# Altium PCB Stacked_Pot_Breakout.PcbDoc
Units mil, origin at the board's own origin, x right, y up, seen from the top; angles counter-clockwise.
Board outline 770 x 460 mil, 2 copper layers (Top Layer, Bottom Layer); 2 components, 7 nets, 18 pads, 0 vias.
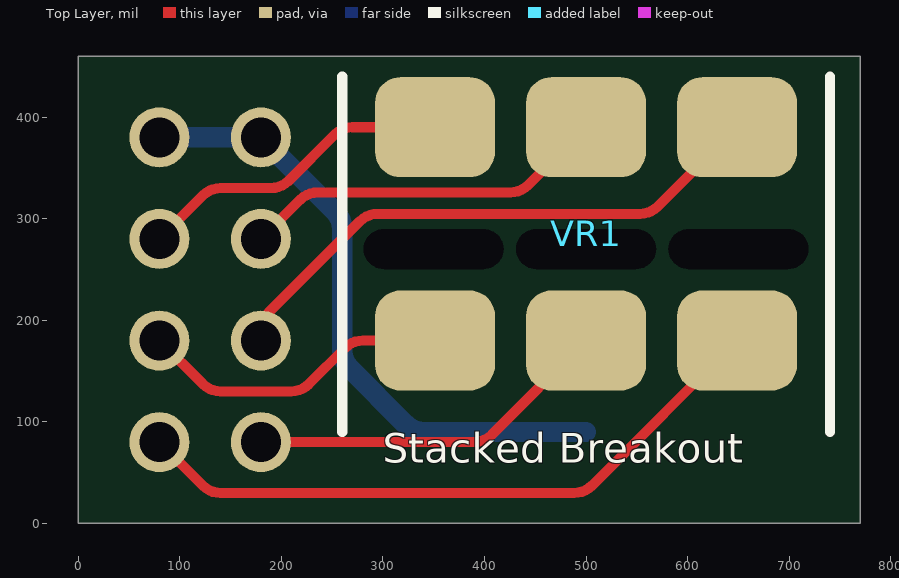
[diagram p0: Top Layer view]
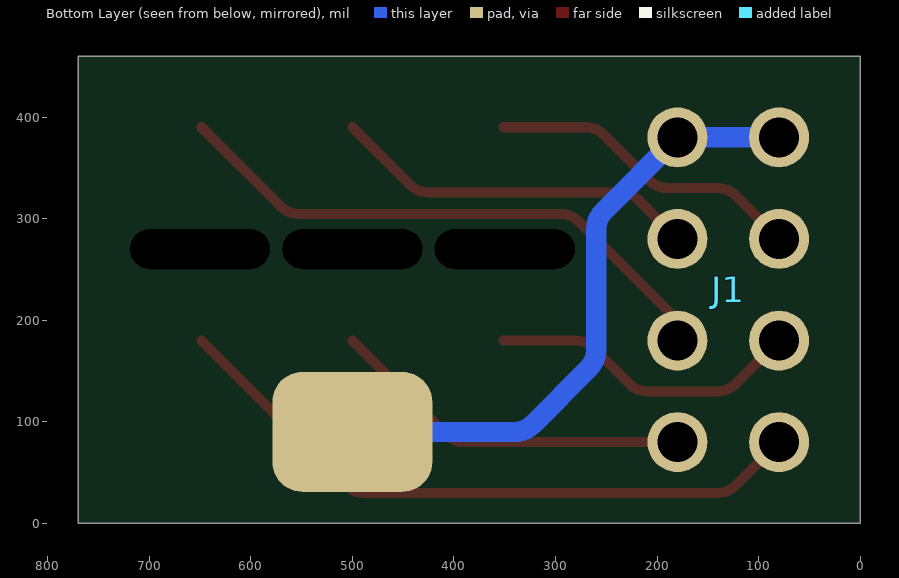
[diagram p1: Bottom Layer view, seen from below]

## Layer stack, top to bottom
Top Solder: solder mask 0.4, Solder Resist, Dk 3.5
Top Layer: signal copper 1.4
Dielectric 1: dielectric 12.6, FR-4, Dk 4.8
Bottom Layer: signal copper 1.4
Bottom Solder: solder mask 0.4, Solder Resist, Dk 3.5

## Board outline
0,0 770,0 770,460 0,460

## Design rules (kind name [scope] priority, off if disabled: settings)
Clearance [All] p1: gap=7 ignorepadtopadclearanceinfootprint=FALSE except(0: Arc-Hole Track-Hole SMDPad-Hole THPad-Hole Via-Hole Fill-Hole Poly-Hole Region-Hole Text-Hole; 10: THPad-THPad THPad-Via THPad-Fill THPad-Poly THPad-Region THPad-Text Via-Via Via-Fill Via-Poly Via-Region Via-Text Fill-Fill Fill-Poly Fill-Region Fill-Text Poly-Poly Poly-Region Poly-Text Region-Region Region-Text Text-Text)
PolygonConnect [All] p1: connectstyle=Relief reliefconductorwidth=10 reliefentries=4 polygonreliefangle="90 Angle" airgapwidth=10
RoutingVias [All] p1: holewidth=28 width=50 viastyle="Through Hole" minholewidth=28 minwidth=50 maxholewidth=28 maxwidth=50
SolderMaskExpansion [All] p1: expansion=4
Width [All] p1: maxlimit=20 minlimit=10 preferedwidth=15
30 further rules are at their usual default settings.

## Components (designator, comment, footprint, x,y, rotation, side; value= is the part's Value field where it differs from the comment)
J1 "CONN HEADER VERT 8POS 2.54MM" "CONN HEADER VERT 8POS 2.54MM" 180,80 r90 bottom
VR1 "Stacked Potentiometer" "STACKED POTENTIOMETER" 500,390 r0 top

## Footprints (in the part's own frame and the unit in brackets; to place one, negate y for a bottom-side part, rotate by r counter-clockwise, add the part's x,y. Pads: shape width x height; smd on the part's side, far side on the other; paste and mask are expansions set on the pad)
"CONN HEADER VERT 8POS 2.54MM" [mm] "Connector Header Through Hole 8 position 0.100\" (2.54mm)"
  round 1.5 hole 1: 1(0,0) 2(2.54,0) 3(5.08,0) 4(7.62,0) 5(7.62,-2.54) 6(5.08,-2.54) 7(2.54,-2.54) 8(0,-2.54)
  body extent -1.27,-3.81 8.89,1.27, height 8.38
"STACKED POTENTIOMETER" [mm] "Stacked Potentiometer"
  rrect50% 3x2.5 smd: 1(-3.775,0) 2(0,0) 3(3.775,0) 4(3.775,-5.334) 5(0,-5.334) 6(-3.775,-5.334)
  round 0 hole 1 slot 3.5 at 0 deg unplated: ""(-3.81,-3.048) ""(0,-3.048) ""(3.81,-3.048)
  silkscreen extent -6.1,-7.62 6.1,1.27

## Part data
J1: "Connector Header Through Hole 8 position 0.100\" (2.54mm)", Digikey Part Number=SAM8996-ND, Manufacturer="Samtec Inc."

## Free pads (board coordinates)
  rrect50% 157.48x118.11 smd far side: ""(500,90)

## Nets (pads, with @x,y where several pads share a name; then routed paths per layer and width w, separated by ;. In a path a pad name is that pad's centre, name@x,y a point inside that pad or via, vN(x,y) a via of type N, cw(c..) or ccw(c..) an arc to the next point about the centre after c; other vN are vias at no path point)
BASS_A: J1.6 VR1.1 | length 313.8
  Top Layer w10: J1.6 122.68,322.68 cw(c140.36,305) 140.36,330 189.64,330 ccw(c189.64,355) 207.32,337.32 252.93,382.93 cw(c270,365.86) 270,390 VR1.1
BASS_B: J1.2 VR1.3 | length 564.1
  Top Layer w10: J1.2 180,189.64 cw(c205,189.64) 187.32,207.32 277.36,297.36 cw(c295.04,279.68) 295.04,304.68 552.95,304.68 ccw(c552.95,329.68) 570.63,312.01 VR1.3
BASS_W: J1.3 VR1.2 | length 363.4
  Top Layer w10: J1.3 218.47,318.47 cw(c236.14,300.79) 236.14,325.79 425.43,325.79 ccw(c425.43,350.79) 443.11,333.11 VR1.2
GND: J1.4 J1.5 pad. | length 618.9
  Bottom Layer w20: J1.5 J1.4 252.68,307.32 cw(c235,289.64) 260,289.64 260,170.36 ccw(c285,170.36) 267.32,152.68 322.68,97.32 ccw(c340.36,115) 340.36,90 pad.
TREB_A: J1.7 VR1.6 | length 309.6
  Top Layer w10: J1.7 122.68,137.32 ccw(c140.36,155) 140.36,130 209.64,130 ccw(c209.64,155) 227.32,137.32 262.68,172.68 cw(c280.36,155) 280.36,180 VR1.6
TREB_B: J1.8 VR1.4 | length 649.3
  Top Layer w10: J1.8 122.68,37.32 ccw(c140.36,55) 140.36,30 488.27,30 ccw(c488.27,55) 505.94,37.32 VR1.4
TREB_W: J1.1 VR1.5 | length 360.3
  Top Layer w10: J1.1 389.64,80 ccw(c389.64,105) 407.32,87.32 VR1.5
pads on no net: VR1.

## Silkscreen, mask and mechanical layers (free items; w line width, h text height)
Top Overlay:
  text "Stacked Breakout" at 300,50 h50
Outline:
  the board outline again, w10